# Altium PCB encoder.PcbDoc
Units mm, origin at the board's own origin, x right, y up, seen from the top; angles counter-clockwise.
Board outline 51.7 x 31.6 mm, 2 copper layers (Top Layer, Bottom Layer); 26 components, 21 nets, 145 pads, 45 vias.
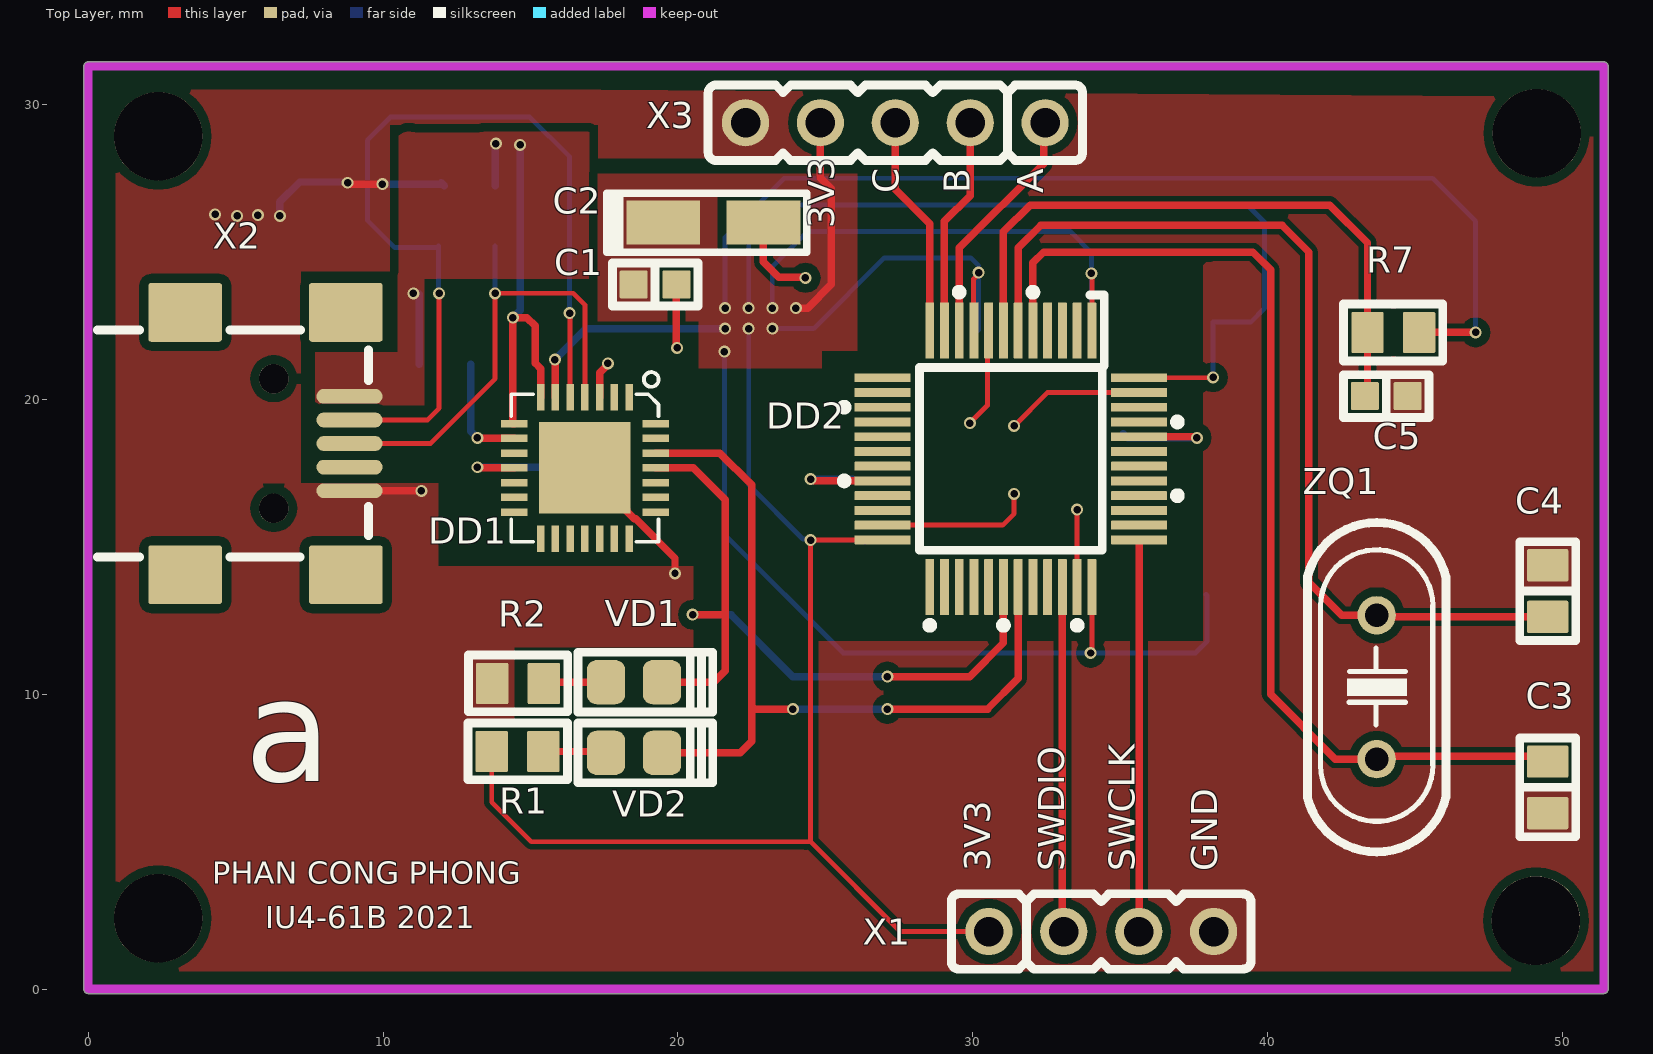
[diagram p0: Top Layer view]
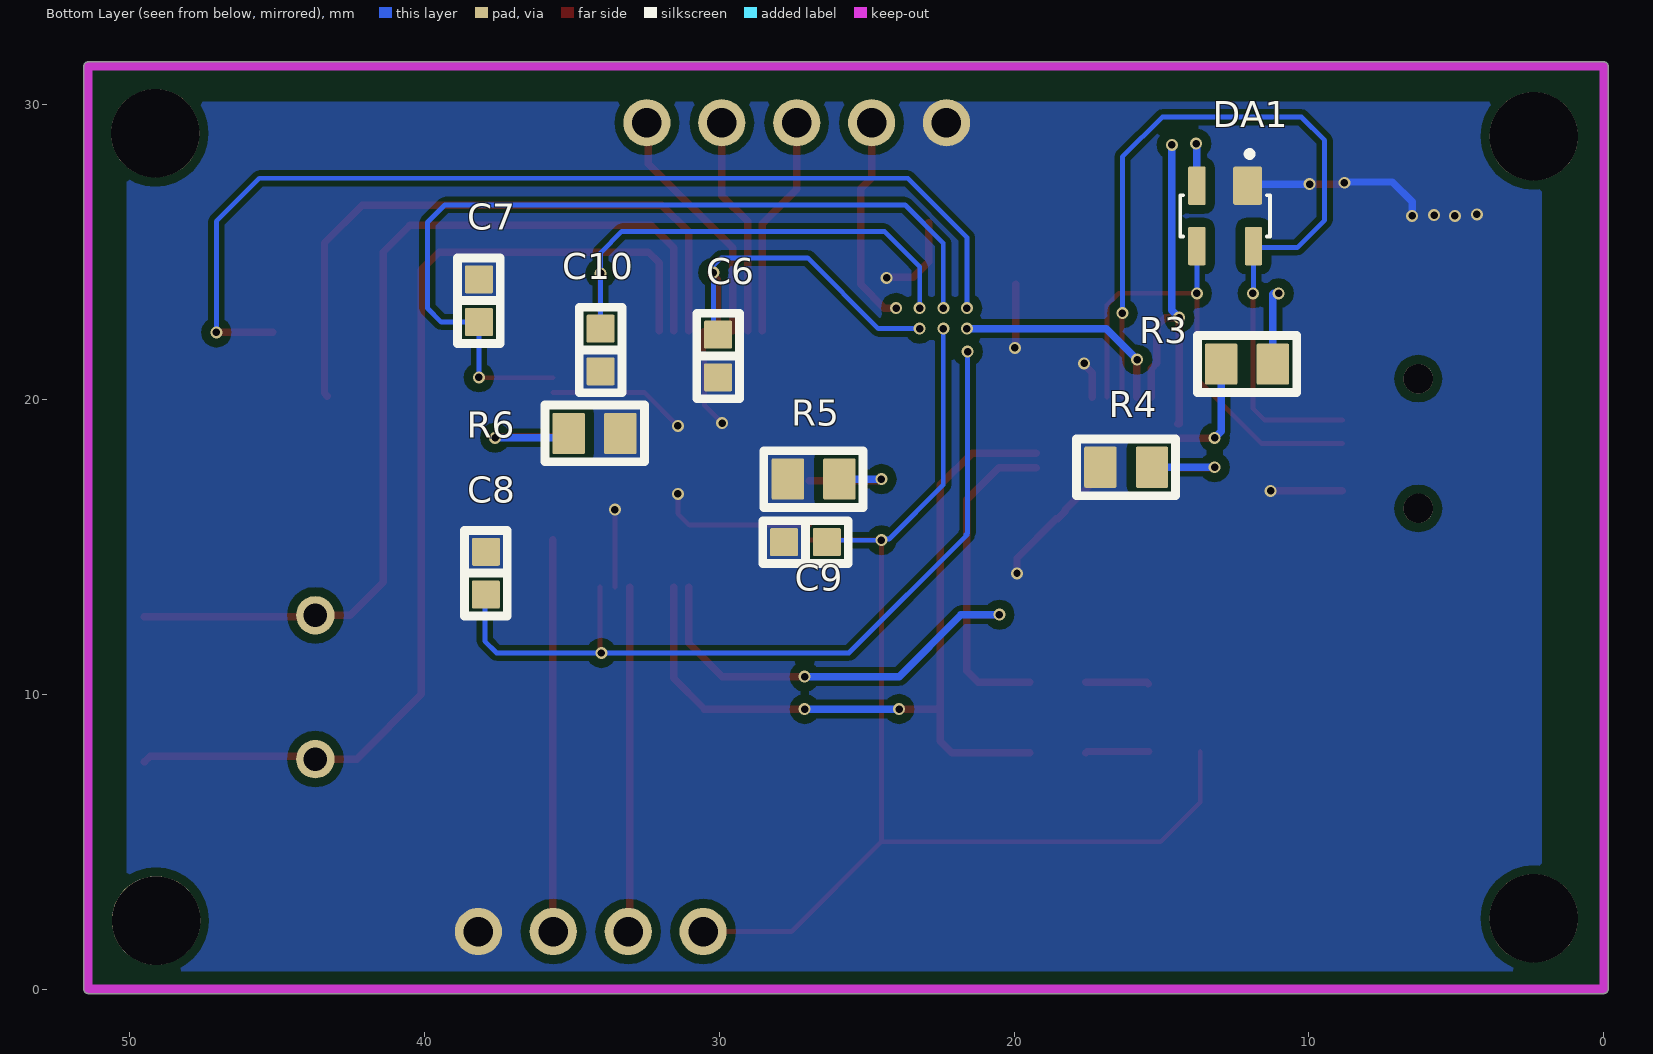
[diagram p1: Bottom Layer view, seen from below]
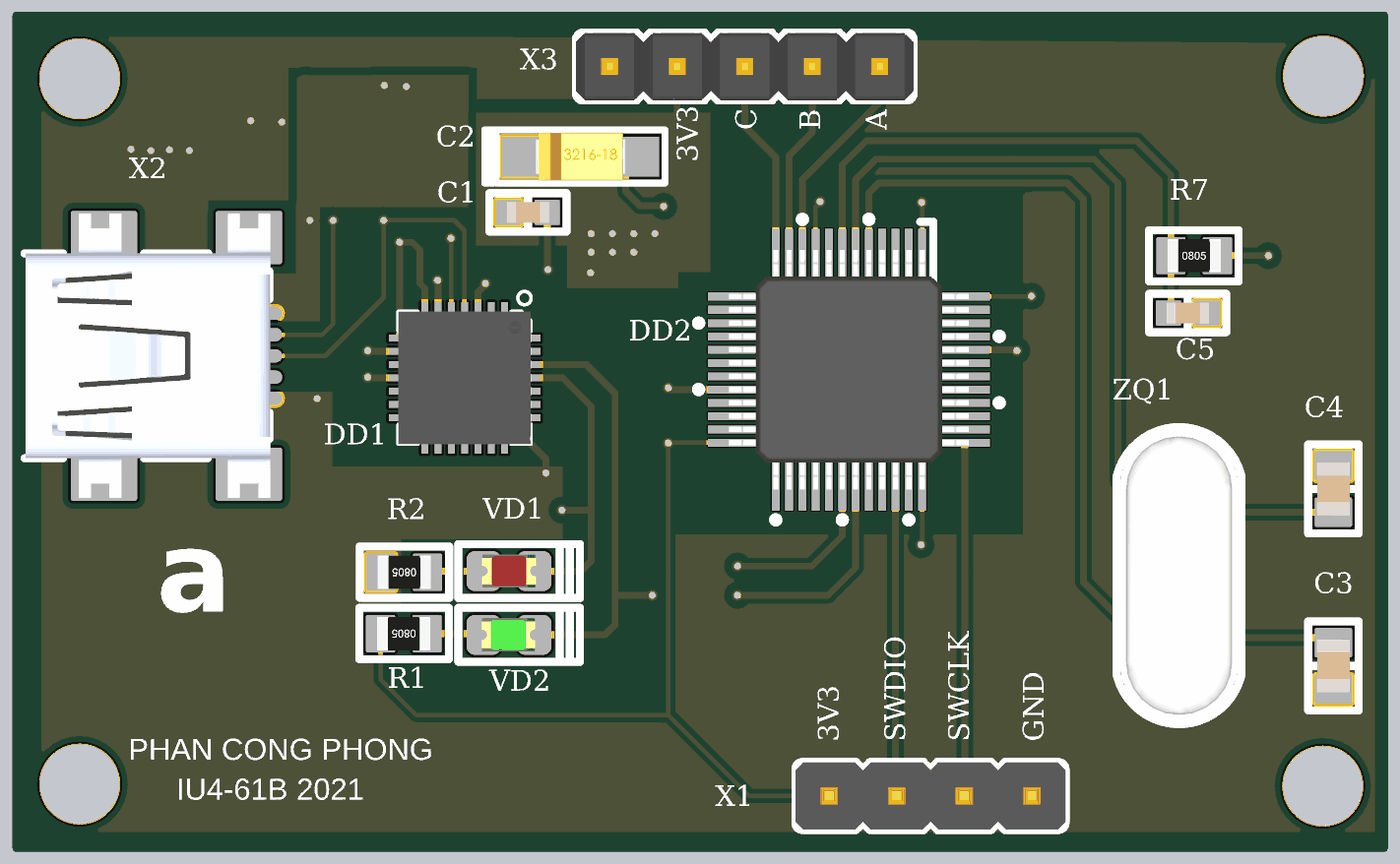
[diagram p2: 3D render of the assembled board from above, using the file's embedded part models]
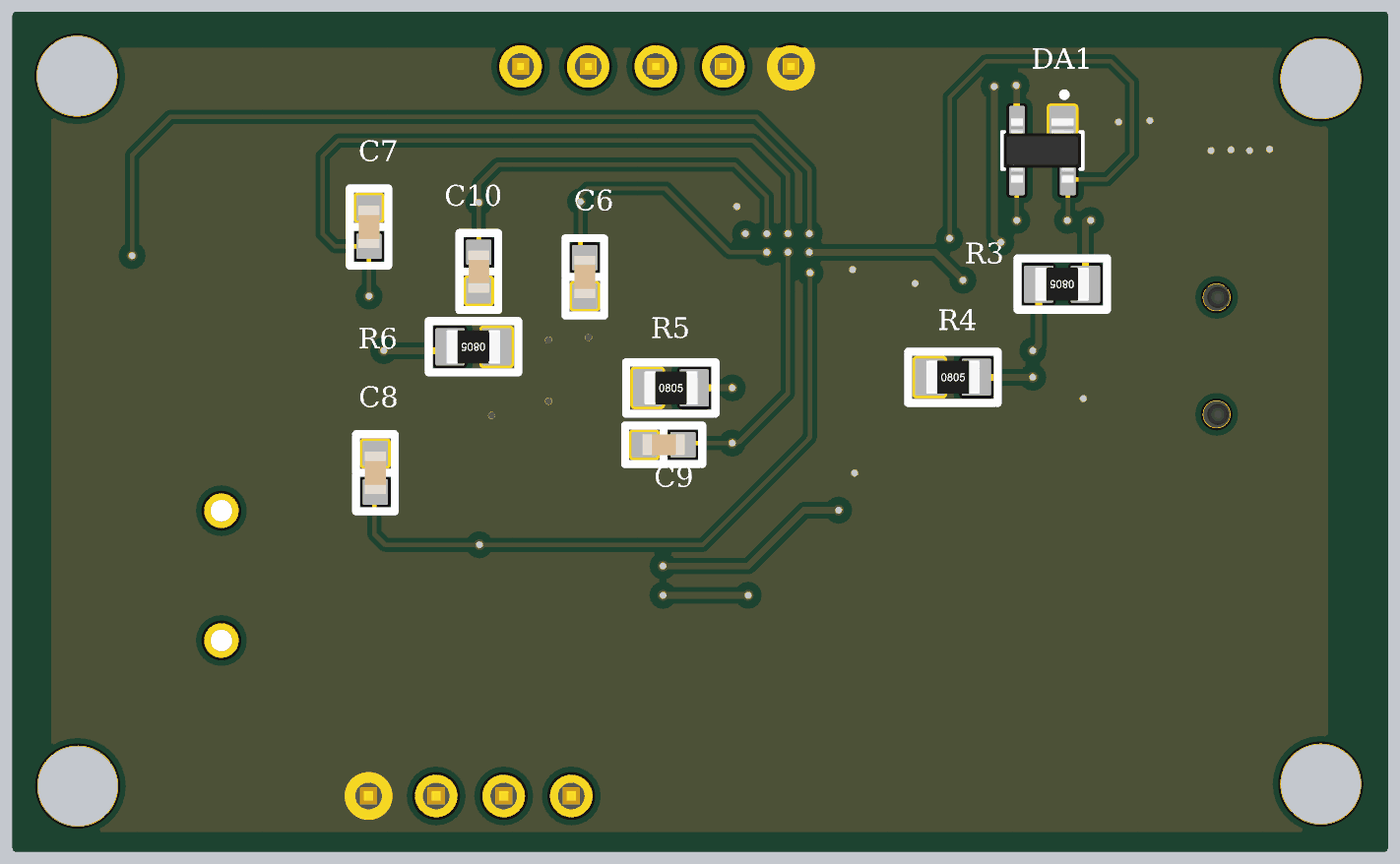
[diagram p3: 3D render of the assembled board from below, using the file's embedded part models]

## Layer stack, top to bottom
Top Solder: solder mask 0.0102, Solder Resist, Dk 3.5
Top Layer: signal copper 0.0356
Dielectric 1: dielectric 0.32, FR-4, Dk 4.8
Bottom Layer: signal copper 0.0356
Bottom Solder: solder mask 0.0102, Solder Resist, Dk 3.5

## Board outline
-0.15,0 ccw(c0,0) 0,-0.15 51.4,-0.15 ccw(c51.4,0) 51.55,0 51.55,31.3 ccw(c51.4,31.3) 51.4,31.45 0,31.45 ccw(c0,31.3) -0.15,31.3

## Design rules (kind name [scope] priority, off if disabled: settings)
Clearance [All] p1: gap=0.3 ignorepadtopadclearanceinfootprint=FALSE except(0: Poly-Region; 0.1: Track-Track Track-SMDPad SMDPad-SMDPad SMDPad-Region THPad-Region; 0.15: Via-Via Via-Hole; 0.18: Track-Poly; 0.2: Arc-Via Track-Via Track-Region SMDPad-Via THPad-Via Poly-Hole)
HoleSize [All] p1: absolutevalues=TRUE maxlimit=10 minlimit=0.2 maxpercent=80.000 minpercent=20.000
MinimumSolderMaskSliver [All] p1: minsoldermaskwidth=0.025
PolygonConnect [All] p1: connectstyle=Direct reliefconductorwidth=0.254 reliefentries=4 polygonreliefangle="90 Angle" airgapwidth=0.254
RoutingVias [All] p1: holewidth=0.254 width=0.406 viastyle="Through Hole" minholewidth=0.254 minwidth=0.406 maxholewidth=0.305 maxwidth=0.61
SilkToSilkClearance [IsText] p1: silktosilkclearance=0.1
SilkToSolderMaskClearance [IsPad] p1: minsilkscreentomaskgap=0.051 clearancetoexposedcopper=TRUE
SolderMaskExpansion [All] p1: expansion=0.102 istentingtop=FALSE
Width [All] p1: maxlimit=0.508 minlimit=0.165 preferedwidth=0.254
26 further rules are at their usual default settings.

## Components (designator, comment, footprint, x,y, rotation, side; value= is the part's Value field where it differs from the comment)
C1 "100nF-25V" "Cap Ceramic 0603 SMD" 19.225,23.9 r180 top
C2 "4.7uF" "cap tantalum  smd a" 21.2,26 r0 top
C3 "22nF-50V" "Cap Ceramic 0805 SMD" 49.5,6.844 r90 top
C4 "22nF-50V" "Cap Ceramic 0805 SMD" 49.5,13.5 r270 top
C5 "100nF-25V" "Cap Ceramic 0603 SMD" 44.023,20.114 r180 top
C6 "100nF-25V" "Cap Ceramic 0603 SMD" 30.039,21.474 r90 bottom
C7 "100nF-25V" "Cap Ceramic 0603 SMD" 38.15,23.35 r270 bottom
C8 "100nF-25V" "Cap Ceramic 0603 SMD" 37.913,14.108 r270 bottom
C9 "100nF-25V" "Cap Ceramic 0603 SMD" 27.075,15.161 r180 bottom
C10 "100nF-25V" "Cap Ceramic 0603 SMD" 34.025,21.675 r90 bottom
DA1 "SP0503BAHTG" SOT143 12.84,26.225 r0 bottom
DD1 "CP2102-GMR(QFN28)" QFN28G_0.5-5X5MM 16.844,17.677 r270 top
DD2 "STM32F103C8" stm32f103c8t6-48LQFP 31.289,17.987 r180 top
R1 "1K" "Res 0805 SMD" 14.559,8.059 r180 top
R2 "1K" "Res 0805 SMD" 14.574,10.365 r180 top
R3 "4,7K-0,125W" "Res 0805 SMD" 12.1,21.2 r0 bottom
R4 "10K" "Res 0805 SMD" 16.196,17.701 r180 bottom
R5 "4,7K-0,125W" "Res 0805 SMD" 26.8,17.3 r180 bottom
R6 "4,7K-0,125W" "Res 0805 SMD" 34.23,18.844 r0 bottom
R7 "4,7K-0,125W" "Res 0805 SMD" 44.263,22.273 r0 top
VD1 "Red" "Led 0805R" 18.511,10.411 r0 top
VD2 "Green" "Led 0805G" 18.511,8.013 r0 top
X1 "Gate_4pins" Header_4 34.357,1.953 r0 top
X2 "MiniUSB" USB_MNI_B 8.86,18.504 r270 top
X3 "Gate_4pins" Header_5 28.642,29.385 r180 top
ZQ1 "8 MHz" CRYSTAL-HC49S 43.7,10.24 r270 top

## Footprints (in the part's own frame and the unit in brackets; to place one, negate y for a bottom-side part, rotate by r counter-clockwise, add the part's x,y. Pads: shape width x height; smd on the part's side, far side on the other; paste and mask are expansions set on the pad)
"Cap Ceramic 0603 SMD" [mm] "Reflow Soldering"
  rrect10% 0.95x0.95 smd mask+0.1: 1(-0.725,0) 2(0.725,0)
  silkscreen extent -1.45,-0.72 1.45,0.73, body extent -0.8,-0.4 0.8,0.4, height 0.85
"Cap Ceramic 0805 SMD" [mm] "Reflow Soldering"
  rrect10% 1.1x1.4 smd mask+0.1: 1(-0.875,0) 2(0.875,0)
  silkscreen extent -1.68,-0.95 1.68,0.95, body extent -1,-0.63 1,0.62, height 0.65
"cap tantalum  smd a" [mm]
  rect 2.5x1.5 smd: 1(-1.7,0) 2(1.7,0)
  silkscreen extent -3.61,-1 3.17,1, body extent -1.7,-0.9 1.7,0.9, height 1.69
CRYSTAL-HC49S [mm]
  round 1.3 hole 0.8 mask+0.1: 1(-2.44,0) 2(2.44,0)
  silkscreen extent -5.59,-2.35 5.59,2.35, body extent -5.49,-2.25 5.49,2.25, height 3.6
Header_4 [mm] "Connector DIP, 4Pin_2.54mm"
  round 1.6 hole 1 mask+0.1: 1(-3.81,0) 2(-1.27,0) 3(1.27,0) 4(3.81,0)
  silkscreen extent -5.08,-1.28 5.08,1.28, body extent -5.08,-1.27 5.08,1.27, height 10.1
Header_5 [mm] "Connector DIP, 4Pin_2.54mm"
  round 1.6 hole 1 mask+0.1: 1(-3.81,0) 2(-1.27,0) 3(1.27,0) 4(3.81,0) 5(6.35,0)
  silkscreen extent -5.08,-1.28 7.62,1.28, body extent -5.08,-1.27 7.62,1.27, height 9.5
"Led 0805G" [mm] "Chip LED; Green; Body 2.0 x 1.3 mm (LxW typ)"
  rrect50% 1.3x1.5 smd: 1(-0.95,0) 2(0.95,0)
  silkscreen extent -1.91,-1.02 2.67,1.02, body extent -1.04,-0.62 0.98,0.62, height 1.1
"Led 0805R" [mm] "Chip LED; RED ; Body 2.0 x 1.3 mm (LxW typ)"
  rrect50% 1.3x1.5 smd: 1(-0.95,0) 2(0.95,0)
  silkscreen extent -1.91,-1.02 2.67,1.02, body extent -1.01,-0.63 1.01,0.62, height 1.1
QFN28G_0.5-5X5MM [mm]
  rect 0.9x0.254 smd: 1(-2.4,1.5) 2(-2.4,1) 3(-2.4,0.5) 4(-2.4,0) 5(-2.4,-0.5) 6(-2.4,-1) 7(-2.4,-1.5) 15(2.4,-1.5) 16(2.4,-1) 17(2.4,-0.5) 18(2.4,0) 19(2.4,0.5) 20(2.4,1) 21(2.4,1.5)
  rect 0.254x0.9 smd: 8(-1.5,-2.4) 9(-1,-2.4) 10(-0.5,-2.4) 11(0,-2.4) 12(0.5,-2.4) 13(1,-2.4) 14(1.5,-2.4) 22(1.5,2.4) 23(1,2.4) 24(0.5,2.4) 25(0,2.4) 26(-0.5,2.4) 27(-1,2.4) 28(-1.5,2.4)
  rect 3.1x3.1 smd paste-3: 29(0,0)
  silkscreen extent -3.25,-2.5 2.5,2.5, body extent -2.5,-2.5 2.5,2.5, height 1
"Res 0805 SMD" [mm] "Reflow Soldering"
  rrect10% 1.1x1.4 smd mask+0.1: 1(-0.875,0) 2(0.875,0)
  silkscreen extent -1.69,-0.97 1.67,0.96, body extent -1,-0.62 1,0.63, height 0.62
SOT143 [mm]
  rrect15% 0.99x1.3 smd: 1(-0.76,-1.025)
  rrect15% 0.59x1.3 smd: 2(0.96,-1.025) 3(0.96,1.025) 4(-0.96,1.025)
  silkscreen extent -1.52,-2.2 1.52,0.7, body extent -1.46,-1.21 1.46,1.21, height 1
stm32f103c8t6-48LQFP [mm] "LQFP-48"
  rrect10% 0.3x1.9 smd mask+0.05: 1(-2.75,-4.35) 2(-2.25,-4.35) 3(-1.75,-4.35) 4(-1.25,-4.35) 5(-0.75,-4.35) 6(-0.25,-4.35) 7(0.25,-4.35) 8(0.75,-4.35) 9(1.25,-4.35) 10(1.75,-4.35) 11(2.25,-4.35) 12(2.75,-4.35) 25(2.75,4.35) 26(2.25,4.35) 27(1.75,4.35) 28(1.25,4.35) 29(0.75,4.35) 30(0.25,4.35) 31(-0.25,4.35) 32(-0.75,4.35) 33(-1.25,4.35) 34(-1.75,4.35) 35(-2.25,4.35) 36(-2.75,4.35)
  rrect10% 1.9x0.3 smd mask+0.05: 13(4.35,-2.75) 14(4.35,-2.25) 15(4.35,-1.75) 16(4.35,-1.25) 17(4.35,-0.75) 18(4.35,-0.25) 19(4.35,0.25) 20(4.35,0.75) 21(4.35,1.25) 22(4.35,1.75) 23(4.35,2.25) 24(4.35,2.75) 37(-4.35,2.75) 38(-4.35,2.25) 39(-4.35,1.75) 40(-4.35,1.25) 41(-4.35,0.75) 42(-4.35,0.25) 43(-4.35,-0.25) 44(-4.35,-0.75) 45(-4.35,-1.25) 46(-4.35,-1.75) 47(-4.35,-2.25) 48(-4.35,-2.75)
  silkscreen extent -5.75,-5.75 5.75,5.75, body extent -4.51,-4.51 4.51,4.51, height 1.56
USB_MNI_B [mm] "USB_MINI_B 9.2mmX7.75mm"
  oval 0.5x2.25 smd: 1(-1.6,0) 2(-0.8,0) 3(0,0) 4(0.8,0) 5(1.6,0)
  rrect10% 2x2.5 smd: 6(-4.45,-0.125) 7(4.45,-0.125) 8(-4.45,-5.575) 9(4.45,-5.575)
  round 1 hole 1 mask+0.1: HOLE1(-2.2,-2.57) HOLE2(2.2,-2.57)
  silkscreen extent -3.85,-8.55 3.85,0.64, body extent -5.35,-8.52 5.35,0.68, height 3.95

## Part data
C1 C5 C6 C7 C8 C9 C10: library part Cap_100nF
C2: library part "Cap_tantalum_4.7uF 16V", "SMD", Chung_Loai=Dán, Don_Vi=Con, Ma_Hang=MH008686, So_Chan=2, Ten_Linh_Kien="Tụ tantalum 475C-4.7uF 16V SMD3216"
C3 C4: library part Cap_22nF
DA1: Package="SOT-143 Littelfuse", Digi-Key_Part_Number=F2715CT-ND, Digi-Key_Purchase_URL=https://www.digikey.com/product-detail/en/littelfuse-inc/SP0503BAHTG/F2715CT-ND/1154322?utm_source=snapeda&utm_medium=aggregator&utm_campaign=symbol, MF="Littelfuse Inc.", MP=SP0503BAHTG, SnapEDA_Link=https://www.snapeda.com/parts/SP0503BAHTG/Littelfuse%20Inc./view-part/214427/?ref=snap
DD1: "USB Bridge, USB to UART USB 2.0 UART", Package="VFQFN-28 Vishay Siliconix", Availability=Unavailable, MF=Silicon, MP=CP2102-GMR, Price=None, SnapEDA_Link=https://www.snapeda.com/parts/CP2102-GMR/Silicon%20Labs/view-part/570818/?ref=snap
DD2: library part STM32F103C8T6
R1 R2: library part Res_1K
R3 R5 R6 R7: library part Res_4K7
R4: library part Res_10K
VD1: library part LED_red
VD2: library part LED_green
X2: library part Mini_USB
X3: library part Gate_5pins
ZQ1: library part "Quartz resonator_8MHz"

## Free pads (board coordinates)
  round 3 hole 3: 2(2.375,28.925) 3(2.375,2.4) 4(49.1,2.325) 5(49.125,29.025)

## Via types
v1: diameter 0.406, hole 0.254, Top Layer to Bottom Layer, tented both sides, 45 vias

## Nets (pads, with @x,y where several pads share a name; then routed paths per layer and width w, separated by ;. In a path a pad name is that pad's centre, name@x,y a point inside that pad or via, vN(x,y) a via of type N, cw(c..) or ccw(c..) an arc to the next point about the centre after c; other vN are vias at no path point)
+3V3: C1.2 C2.1 C6.2 C7.2 C8.2 C9.2 C10.2 DD1.6 DD2.1 DD2.9 DD2.24 DD2.36 DD2.48 R1.2 R7.2 X1.1 X3.4 | length 180.9
  Top Layer w0.165: R1.2 13.684,6.341 15.025,5 24.5,5 ; DD2.24 24.512,15.237 v1(24.5,15.225) 24.5,5 ; DD2.9 30.025,22.351 30.025,24.083 30.2,24.258 v1(30.2,24.3) ; X1.1 27.547,1.953 24.5,5 ; v1(34,11.4) 34.039,11.439 DD2.36 ; v1(34.025,24.275) 34.039,24.261 DD2.1 ; DD2.48 38.137,20.737 v1(38.15,20.75)
  Top Layer w0.254: v1(15.825,21.35) 15.844,21.331 DD1.6 ; v1(24,23.1) 24.4,23.1 25.2,23.9 25.2,27.15 24.832,27.518 X3.4 ; R7.2 v1(47.057,22.273)
  Bottom Layer w0.165: v1@21.554,22.446 v1(21.6,22.4) ; v1(21.575,21.625) 21.575,15.475 21.625,15.425 21.6,15.4 25.6,11.4 v1(34,11.4) 37.55,11.4 37.95,11.8 37.95,13.346 C8.2 ; v1(21.6,23.1) 21.6,25.5 23.6,27.5 45.6,27.5 47.057,26.043 v1(47.057,22.273) ; v1(22.4,22.4) 22.4,17.1 24.234,15.266 24.459,15.266 v1(24.5,15.225) 26.286,15.225 C9.2 ; v1(22.4,23.1) 22.4,25.3 23.7,26.6 39.3,26.6 39.9,26 39.9,23.1 39.425,22.625 C7.2 v1(38.15,20.75) ; v1(23.2,22.4) 24.6,22.4 27,24.8 29.928,24.8 30.2,24.528 v1(30.2,24.3) 30.2,22.36 C6.2 ; v1(23.2,23.1) 23.2,24.5 23.5,24.8 24.4,25.7 33.3,25.7 34.025,24.975 v1(34.025,24.275) C10.2
  Bottom Layer w0.254: v1(15.825,21.35) 16.875,22.4 v1(21.6,22.4)
+5V: DA1.2 DD1.7 DD1.8 R3.1 X2.1 | length 17
  Top Layer w0.254: DD1.8 14.4,19.177 v1(14.4,22.775) 14.875,22.775 15.156,22.494 15.156,21.236 15.344,21.048 DD1.7
  Bottom Layer w0.254: v1(11.025,23.6) 11.2,23.6 11.225,23.575 R3.1 ; DA1.2 13.8,28.65 v1(13.825,28.675) ; v1(14.4,22.775) 14.65,23.025 v1(14.65,28.633)
GND: C1.1 C2.2 C3.1 C4.1 C5.1 C6.1 C7.1 C8.1 C9.1 C10.1 DA1.1 DD1.3 DD1.29 DD2.8 DD2.23 DD2.35 DD2.47 R2.2 R4.1 R5.1 R6.1 X1.4 X2.5 X3.5 | length 36.2
  Top Layer w0.165: DD2.23 31.012,15.737 31.4,16.125 v1(31.4,16.8) ; v1(29.9,19.2) 30.5,19.8 30.5,21.47 30.537,21.506 30.57,21.506 30.539,21.537 DD2.8 ; v1(31.4,19.1) 32.537,20.237 DD2.47 ; DD2.35 v1(33.539,16.261)
  Top Layer w0.254: v1(8.8,27.35) 8.85,27.3 v1(9.975,27.3) ; X2.5 11.3,16.904 v1(11.3,16.9) ; DD1.29 18.267,16.254 18.267,16.208 18.521,15.954 18.565,15.954 19.9,14.619 v1(19.9,14.1) ; DD1.3 17.344,20.903 17.549,21.108 17.625,21.184 v1(17.625,21.225) ; C1.1 19.95,21.775 v1(19.975,21.75) ; C2.2 22.9,24.675 23.425,24.15 24.3,24.15 v1(24.325,24.125)
  Bottom Layer w0.254: v1(6.5,26.225) 6.5,26.7 7.175,27.375 8.775,27.375 v1(8.8,27.35) ; v1(9.975,27.3) 11.93,27.3 11.98,27.35 DA1.1
  other v1: 5.05,26.225 5.75,26.25 4.3,26.275
NetC3_2: C3.2 DD2.5 ZQ1.2 | length 35.6
  Top Layer w0.254: DD2.5 32.039,24.639 32.4,25 39.5,25 40.1,24.4 40.1,10 42.3,7.8 ZQ1.2 43.8,7.9 49.3,7.9 49.481,7.719 C3.2
NetC4_2: C4.2 DD2.6 ZQ1.1 | length 33.1
  Top Layer w0.254: DD2.6 31.539,25.139 32.3,25.9 40.5,25.9 41.4,25 41.4,13.8 42.52,12.68 ZQ1.1 43.755,12.625 C4.2
NetC5_2: C5.2 DD2.7 R7.1 | length 21.8
  Top Layer w0.254: DD2.7 31.039,25.686 31.944,26.591 42.104,26.591 43.388,25.307 R7.1 43.388,20.204 C5.2
NetDD1_9: DD1.9 R3.2 | length 3.8
  Top Layer w0.254: v1(13.2,18.7) 13.223,18.677 DD1.9
  Bottom Layer w0.254: R3.2 12.975,18.925 v1(13.2,18.7)
NetDD1_11: DD1.11 R4.2 | length 3.4
  Top Layer w0.254: v1(13.2,17.7) 13.223,17.677 DD1.11
  Bottom Layer w0.254: v1(13.2,17.7) 15.32,17.7 R4.2
NetDD2_10: DD2.10 X3.1 | length 8.3
  Top Layer w0.254: DD2.10 29.539,25.139 32.4,28 32.4,29.333 X3.1
NetDD2_11: DD2.11 X3.2 | length 7.4
  Top Layer w0.254: DD2.11 29.039,26.039 29.912,26.912 X3.2
NetDD2_12: DD2.12 X3.3 | length 7.5
  Top Layer w0.254: X3.3 27.372,27.128 28.539,25.961 DD2.12
NetDD2_20: DD2.20 R5.2 | length 3.9
  Top Layer w0.254: v1(24.5,17.3) 24.541,17.3 24.604,17.237 DD2.20
  Bottom Layer w0.254: v1(24.5,17.3) R5.2
NetDD2_34: DD2.34 X1.2 | length 11.7
  Top Layer w0.254: DD2.34 33.039,2.001 X1.2
NetDD2_37: DD2.37 X1.3 | length 13.3
  Top Layer w0.254: X1.3 35.639,1.965 DD2.37
NetDD2_44: DD2.44 R6.2 | length 4.5
  Top Layer w0.254: DD2.44 37.522,18.737 37.559,18.7 v1(37.6,18.7)
  Bottom Layer w0.254: R6.2 35.249,18.7 v1(37.6,18.7)
NetR1_1: R1.1 VD2.1 | length 2.1
  Top Layer w0.254: R1.1 17.515,8.059 VD2.1
NetR2_1: R2.1 VD1.1 | length 2.1
  Top Layer w0.254: R2.1 15.495,10.411 VD1.1
RXD: DD1.25 DD2.30 VD1.2 | length 25.8
  Top Layer w0.254: DD1.25 20.523,17.677 21.6,16.6 21.6,12.7 ; VD1.2 21.211,10.411 21.6,10.8 21.6,12.7 ; v1(20.5,12.7) 21.6,12.7 ; v1(27.1,10.6) 29.9,10.6 31.039,11.739 DD2.30
  Bottom Layer w0.254: v1(20.5,12.7) 21.8,12.7 23.9,10.6 v1(27.1,10.6)
TXD: DD1.26 DD2.31 VD2.2 | length 28.2
  Top Layer w0.254: DD1.26 21.423,18.177 22.5,17.1 22.5,9.6 ; VD2.2 22.113,8.013 22.5,8.4 22.5,9.6 ; v1(23.9,9.5) 22.6,9.5 22.5,9.6 ; v1(27.1,9.5) 30.5,9.5 31.539,10.539 DD2.31
  Bottom Layer w0.254: v1(23.9,9.5) v1(27.1,9.5)
USBDM: DA1.4 DD1.5 X2.2 | length 30.2
  Top Layer w0.165: X2.2 8.864,19.3 11.5,19.3 11.9,19.7 v1(11.9,23.6) ; v1(16.325,22.925) 16.344,22.925 DD1.5
  Bottom Layer w0.165: v1(11.9,23.6) 11.88,23.62 DA1.4 11.83,25.15 10.4,25.15 9.465,26.085 9.465,28.79 10.25,29.575 14.975,29.575 16.325,28.225 v1(16.325,22.925)
USBDP: DA1.3 DD1.4 X2.3 | length 16.7
  Top Layer w0.165: X2.3 11.604,18.504 13.8,20.7 v1(13.8,23.6) 16.45,23.6 16.844,23.206 DD1.4
  Bottom Layer w0.165: v1(13.8,23.6) DA1.3
pads on no net: DD1.1 DD1.2 DD1.10 DD1.12 DD1.13 DD1.14 DD1.15 DD1.16 DD1.17 DD1.18 DD1.19 DD1.20 DD1.21 DD1.22 DD1.23 DD1.24 DD1.27 DD1.28 DD2.2 DD2.3 DD2.4 DD2.13 DD2.14 DD2.15 DD2.16 DD2.17 DD2.18 DD2.19 DD2.21 DD2.22 DD2.25 DD2.26 DD2.27 DD2.28 DD2.29 DD2.32 DD2.33 DD2.38 DD2.39 DD2.40 DD2.41 DD2.42 DD2.43 DD2.45 DD2.46 X2.4 X2.6 X2.7 X2.8 X2.9 X2.HOLE1 X2.HOLE2

## Polygon pours and split planes (outlines as drawn)
GND on Top Layer "GND-Top" (solid, remove dead copper, pour order 20): 17.3,30.5 17.3,28.175 26.35,28.175 26.35,24.625 37.575,24.625 37.575,24.65 38.05,24.65 38.05,24.675 37.825,24.675 37.825,11.8 24.275,11.8 24.275,0.6 51.05,0.6 51.05,30.25 51.2,30.25
+5V on Top Layer "+5V" (solid, remove dead copper, pour order 31): 7.7,19.8 11.4,19.8 11.4,24.1 17,24.1 17,29.1 10.5,29.1 10.5,21.6 7.7,21.6
+3V3 on Top Layer "+3V3-1" (solid, remove dead copper, pour order 29): 23.025,21.05 23.025,22.2 26.075,22.2 26.075,21.65 24.875,21.65 24.875,21.05
GND on Top Layer "GND-Top" (solid, remove dead copper, pour order 28): 0.925,17.15 0.925,30.499 17.39,30.499 17.39,29.338 17.3,29.338 17.3,29.325 10.225,29.325 10.225,24.35 7.2,24.35 7.2,17.15
GND on Top Layer "GND-Top" (solid, remove dead copper, pour order 26): 24.275,0.6 24.275,7 14.45,7 14.45,11.6 20.525,11.6 20.525,14.35 11.875,14.35 11.875,17.15 0.925,17.15 0.925,0.6
+3V3 on Top Layer "+3V3-1" (solid, remove dead copper, pour order 1): 17.275,22.65 20.7,22.65 20.7,21.05 23.025,21.05 24.175,22.2 26.075,22.2 26.075,27.65 17.275,27.65
GND on Bottom Layer "GND-Bottom" (solid, remove dead copper, pour order 32): 2.1,30 2.1,0.6 50.1,0.6 50.1,30.1 1.9,30.1 1.9,30.2

## Keep-outs
Keep-Out Layer:
  lines w0.3: 0,22.4 0,31.3 51.4,31.3 51.4,0 0,0 0,22.7

## Silkscreen, mask and mechanical layers (free items; w line width, h text height)
Top Overlay:
  text "C" at 27.8,27 h1.52 r90
  text "B" at 30.2,27 h1.52 r90
  text "A" at 32.7,27.001 h1.52 r90
  text "3V3" at 25.6,25.801 h1.52 r90
  text "a" at 5.3,5.9 h6
  text "3V3" at 30.9,4.001 h1.52 r90
  text "SWDIO" at 33.4,4 h1.52 r90
  text "SWCLK" at 35.8,4 h1.52 r90
  text "GND" at 38.6,4 h1.52 r90
  text "PHAN CONG PHONG" at 4.2,3.314 h1.3
  text "IU4-61B 2021" at 6,1.814 h1.3

## Text inside footprints (layer, text, board x,y; h text height)
DD2: Mechanical 2 "25" at 30.089,15.387 h0.8 r180; Mechanical 2 "24" at 27.889,16.487 h0.8 r270; Mechanical 2 "13" at 27.889,20.887 h0.8 r270; Mechanical 2 "12" at 29.989,21.387 h0.8 r180; Mechanical 2 "36" at 34.189,15.387 h0.8 r180; Mechanical 2 "37" at 33.889,16.487 h0.8 r270; Mechanical 2 "48" at 33.989,20.487 h0.8 r270
X1: Mechanical 2 "4" at 37.913,1.699 h1.2; Mechanical 2 "1" at 30.293,1.699 h1.2
X2: Mechanical 2 "5" at 6.32,17.234 h1.2 r270; Mechanical 2 "1" at 6.32,20.282 h1.2 r270
X3: Mechanical 2 "1" at 32.706,29.639 h1.2 r180; Mechanical 2 "5" at 22.546,29.766 h1.2 r180